# EAGLE board jr-support (EAGLE 8.1.0)
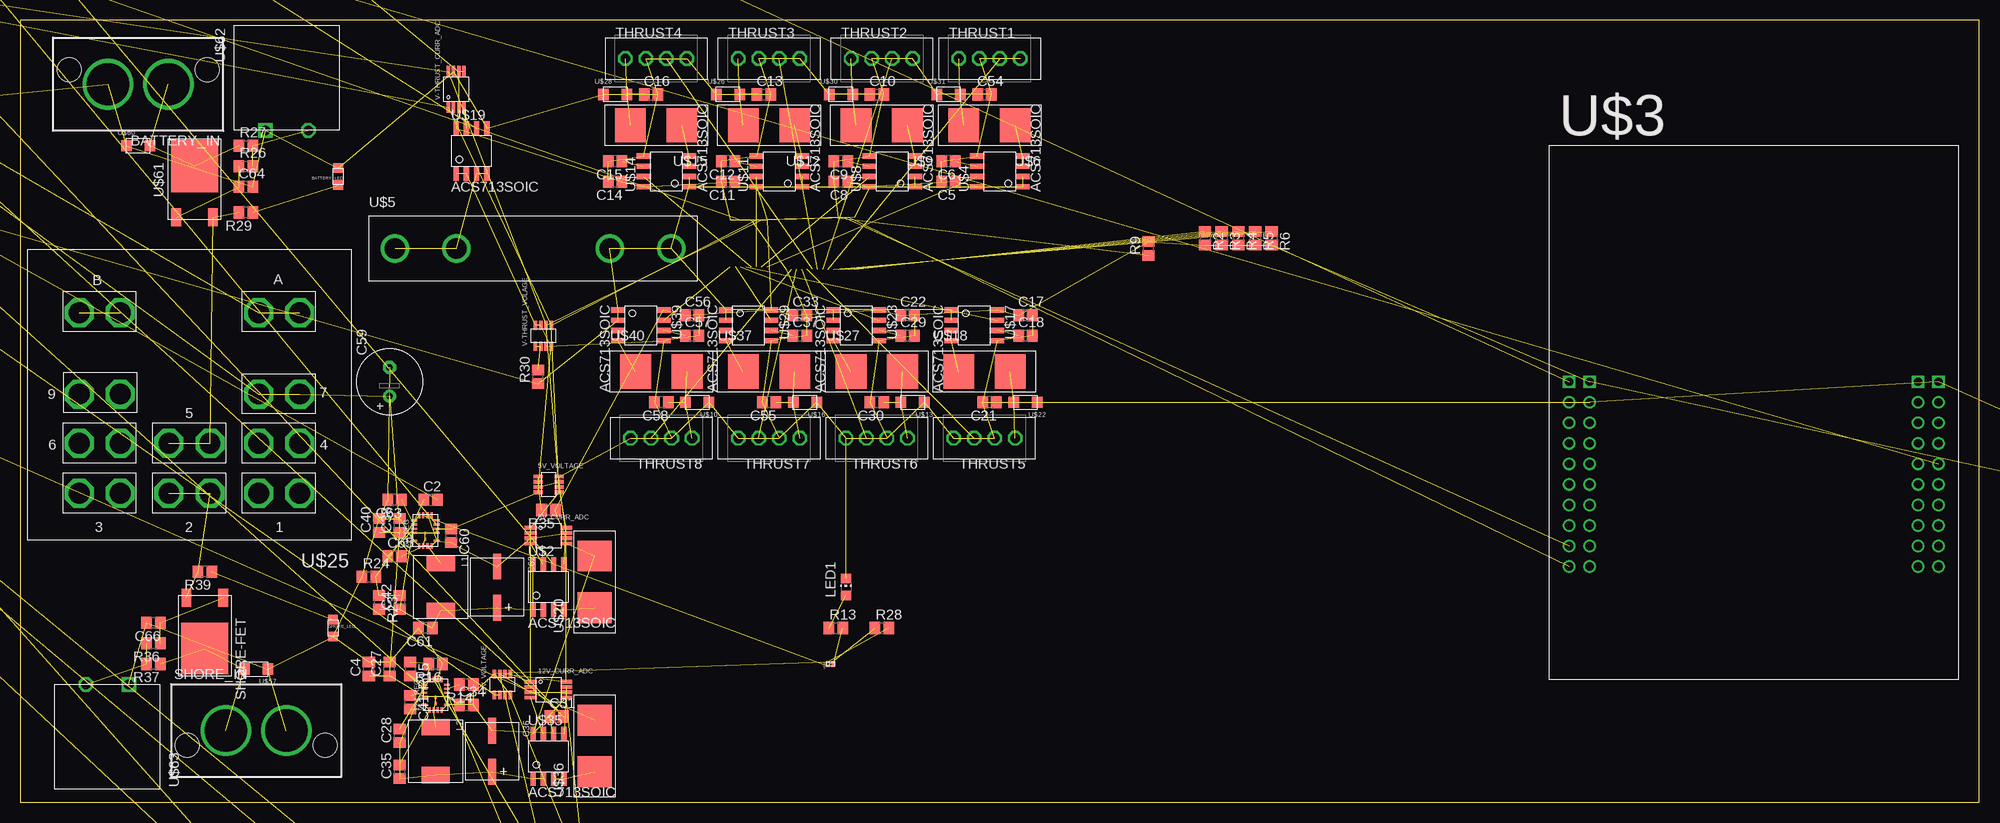
[diagram p0: board, top side]
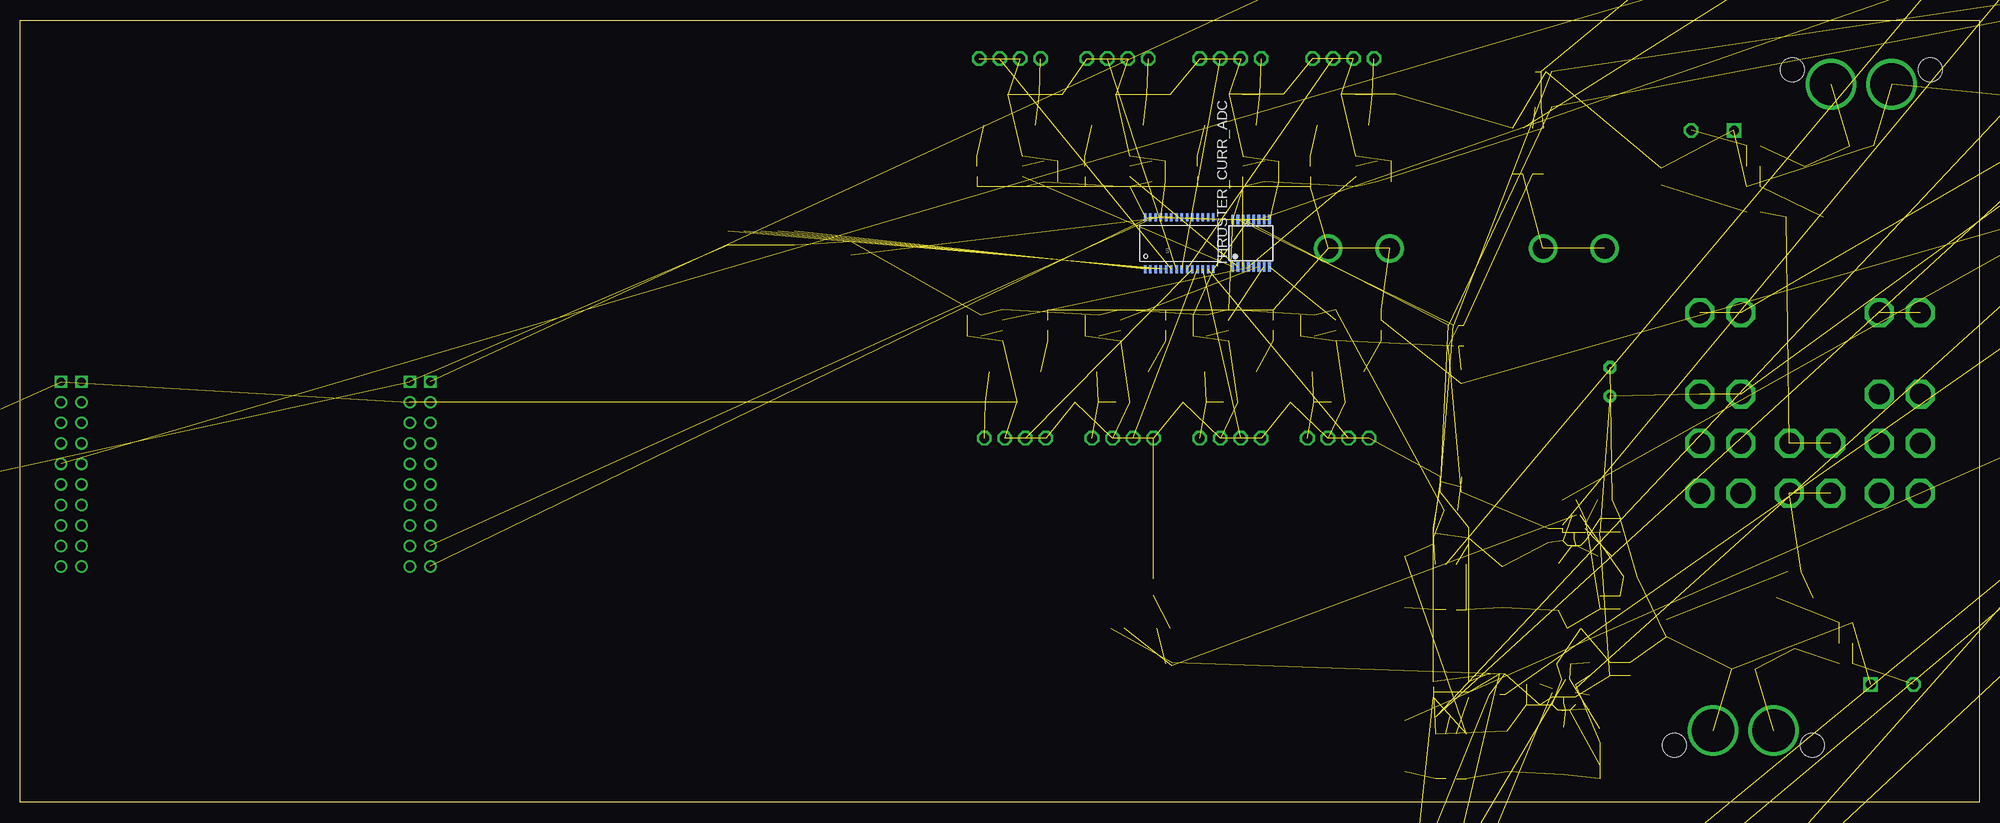
[diagram p1: board, bottom side, seen from below]

Size 242.55 x 96.83 mm. Coordinates in mm from the lower left corner, seen from the top.
Outline: 0,0 242.55,0 242.55,96.83 0,96.83 0,0
Copper layers (1*16): Top 0.035mm / dielectric 1.5mm / Bottom 0.035mm
Design rules "default": minimum track width 10mil, minimum drill 24mil, track to track 8mil, track to pad 8mil, pad to pad 8mil, via to via 8mil, smd to smd 8mil, copper to edge 40mil, drill to drill 8mil, minimum pad ring 10mil, minimum via ring 8mil, stop-mask expansion 4mil, vias tented up to drill 0mil, thermal gap 10mil
Holes 3.17 mm at 22.86,-27.94 30.48,-21.59 34.29,-27.94 30.48,-30.48

## Footprints (pad centres in the part's own frame; a part is rotated, then mirrored left to right if it is on the bottom)
0805 = smd 1.2 x 1.2: P$1 -1.05,0; P$2 1.05,0
VSSOP-8 = smd 0.45 x 1.45: P$1 -0.975,-2.2; P$2 -0.325,-2.2; P$3 0.325,-2.2; P$4 0.975,-2.2; P$5 0.975,2.2; P$6 0.325,2.2; P$7 -0.325,2.2; P$8 -0.975,2.2
KK254_VERT_2PIN = drill 1.2 octagon: P$1 1.27,0; P$2 -1.27,0
QFN18-3X4 = smd 0.25 x 0.7: 1 1.25,1.4; 2 0.75,1.4; 3 0.25,1.4; 4 -0.25,1.4; 6 -1.25,1.4; 11 -1.25,-1.4; 13 -0.25,-1.4; 14 0.25,-1.4; 15 0.75,-1.4; 16 1.25,-1.4 | smd 0.7 x 0.25: 7 -1.9,0.75; 8 -1.9,0.25; 9 -1.9,-0.25; 10 -1.9,-0.75; 17 1.9,-0.75; 18 1.9,-0.25; 19 1.9,0.25; 20 1.9,0.75 | smd 0.4 x 0.22: 21 -1.075,0 | smd 0.356 x 0.22: 22 -0.305,0
SOT-23-8 = smd 0.45 x 1.1: P$1 -0.975,-1.3; P$2 -0.325,-1.3; P$3 0.325,-1.3; P$4 0.975,-1.3; P$5 0.975,1.3; P$6 0.325,1.3; P$7 -0.325,1.3; P$8 -0.975,1.3
SUPERSABRE_2CIRCUIT = drill 5.25: P$1 -3.747,0; P$2 3.747,0 | hole 2.997: -8.534,-1.803; 8.534,-1.803
BME280_LGA = smd 0.5 x 0.35: P$1 1.025,0.975; P$2 1.025,0.325; P$3 1.025,-0.325; P$4 1.025,-0.975; P$5 -1.025,-0.975; P$6 -1.025,-0.325; P$7 -1.025,0.325; P$8 -1.025,0.975
C0805 = smd 1.3 x 1.5: 1 -0.85,0; 2 0.85,0
C-F80 = smd 1 x 3.2: P$1 0,2.55; P$2 0,-2.53
E3,5-8 = drill 0.813 pad 1.6: + -1.778,0 | drill 0.813 pad 1.6 octagon: - 1.778,0
KK254_VERT_4PIN = drill 1.2 octagon: P$1 3.81,0; P$2 1.27,0; P$3 -1.27,0; P$4 -3.81,0
SM8 = smd 0.3 x 1.6: P$1 -0.975,-1.7; P$2 -0.34,-1.7; P$3 0.295,-1.7; P$4 0.93,-1.7; P$5 0.93,1.7; P$6 0.295,1.7; P$7 -0.34,1.7; P$8 -0.975,1.7
L0740 = smd 2 x 3.5: P$1 -2.95,0; P$2 2.95,0
CHIP-LED0805 = smd 1.2 x 1.2: A 0,-1.05; C 0,1.05
R0805 = smd 1.3 x 1.5: 1 -0.85,0; 2 0.85,0
TO252-3 = smd 1.2 x 2.2: 1 -2.28,-6.3; 3 2.28,-6.3 | smd 5.8 x 6.4: TAB 0,0
TSSOP16 = smd 0.35 x 1.2: 1 -2.275,-2.925; 2 -1.625,-2.925; 3 -0.975,-2.925; 4 -0.325,-2.925; 5 0.325,-2.925; 6 0.975,-2.925; 7 1.625,-2.925; 8 2.275,-2.925; 9 2.275,2.925; 10 1.625,2.925; 11 0.975,2.925; 12 0.325,2.925; 13 -0.325,2.925; 14 -0.975,2.925; 15 -1.625,2.925; 16 -2.275,2.925
TSSOP-28_4MM = smd 1 x 0.3: 1 -3.2,4.225; 2 -3.2,3.575; 3 -3.2,2.925; 4 -3.2,2.275; 5 -3.2,1.625; 6 -3.2,0.975; 7 -3.2,0.325; 8 -3.2,-0.325; 9 -3.2,-0.975; 10 -3.2,-1.625; 11 -3.2,-2.275; 12 -3.2,-2.925; 13 -3.2,-3.575; 14 -3.2,-4.225; 15 3.2,-4.225; 16 3.2,-3.575; 17 3.2,-2.925; 18 3.2,-2.275; 19 3.2,-1.625; 20 3.2,-0.975; 21 3.2,-0.325; 22 3.2,0.325; 23 3.2,0.975; 24 3.2,1.625; 25 3.2,2.275; 26 3.2,2.925; 27 3.2,3.575; 28 3.2,4.225
ACS713-SOIC = smd 0.65 x 1.75: P$1 -1.905,-2.8; P$2 -0.635,-2.8; P$3 0.635,-2.8; P$4 1.905,-2.8; P$5 1.905,2.8; P$6 0.635,2.8; P$7 -0.635,2.8; P$8 -1.905,2.8
TIVA-C_EVAL = drill 1.016 square: 1-1 -22.86,3.81; 2-1 22.86,3.81; 3-1 -20.32,3.81; 4-1 20.32,3.81 | drill 1.016: 1-2 -22.86,1.27; 1-3 -22.86,-1.27; 1-4 -22.86,-3.81; 1-5 -22.86,-6.35; 1-6 -22.86,-8.89; 1-7 -22.86,-11.43; 1-8 -22.86,-13.97; 1-9 -22.86,-16.51; 1-10 -22.86,-19.05; 2-2 22.86,1.27; 2-3 22.86,-1.27; 2-4 22.86,-3.81; 2-5 22.86,-6.35; 2-6 22.86,-8.89; 2-7 22.86,-11.43; 2-8 22.86,-13.97; 2-9 22.86,-16.51; 2-10 22.86,-19.05; 3-2 -20.32,1.27; 3-3 -20.32,-1.27; 3-4 -20.32,-3.81; 3-5 -20.32,-6.35; 3-6 -20.32,-8.89; 3-7 -20.32,-11.43; 3-8 -20.32,-13.97; 3-9 -20.32,-16.51; 3-10 -20.32,-19.05; 4-2 20.32,1.27; 4-3 20.32,-1.27; 4-4 20.32,-3.81; 4-5 20.32,-6.35; 4-6 20.32,-8.89; 4-7 20.32,-11.43; 4-8 20.32,-13.97; 4-9 20.32,-16.51; 4-10 20.32,-19.05
1.25"_FUSECLIPS = drill 2.54: P$1 -17.107,0; P$2 -9.487,0; P$3 9.487,0; P$4 17.107,0
154-OMNI-BLOK = smd 3.81 x 4.242: P$1 -3.188,0; P$2 3.188,0
DO-219AB = smd 1.3 x 1.4: P$1 -1.45,0; P$2 1.45,0
KUHP_6.35MM-QUICK-CONNECT = drill 2.57 octagon: 1A -13.64,6.17; 1B -8.56,6.17; 2A -2.54,6.17; 2B 2.54,6.17; 3A 8.56,6.17; 3B 13.64,6.17; 4A -13.64,0; 4B -8.56,0; 5A -2.54,0; 5B 2.54,0; 6A 8.56,0; 6B 13.64,0; 7A -13.64,-6.1; 7B -8.56,-6.1; 9A 8.56,-6.1; 9B 13.64,-6.1; AA -13.64,-16.18; AB -8.56,-16.18; BA 8.56,-16.18; BB 13.64,-16.18
TSSOP5 = smd 0.3 x 0.6: P$1 -0.65,-1.125; P$2 0,-1.125; P$3 0.65,-1.125; P$4 0.65,1.125; P$5 -0.62,1.125
SOD-923_SMD = smd 0.36 x 0.25: P$1 -0.78,0; P$2 0.78,0
X1-DFN1006-2 = smd 0.4 x 0.7: P$1 -0.35,0; P$2 0.35,0
AP02002 = smd 0.4 x 0.25: P$1 -0.35,0.225; P$2 -0.35,-0.225 | smd 0.4 x 0.7: P$3 0.35,0
GPTS203211B = drill 1.2 square: P$1 0,-2.65 | drill 1.2 octagon: P$2 0,2.65

## Placement (x,y rotation side)
3V3_LED  [0805]  -64.77,168.91 0 top  (outside the outline)
5V_CURR_ADC  ADC121C021  [VSSOP-8]  65.41,33.02 270 top
5V_LED  [0805]  -53.34,168.91 0 top  (outside the outline)
5V_OUT  5V_OUT  [KK254_VERT_2PIN]  -134.62,83.82 0 top  (outside the outline)
5V_REG  LT8640  [QFN18-3X4]  50.16,33.66 90 top
5V_VOLTAGE  INA219SOT23  [SOT-23-8]  65.41,39.37 270 top
12V_CURR_ADC  ADC121C021  [VSSOP-8]  65.41,13.97 270 top
12V_LED  [0805]  -60.96,168.91 0 top  (outside the outline)
12V_OUT  12V_OUT  [KK254_VERT_2PIN]  -97.16,83.82 0 top  (outside the outline)
12V_REG  LT8640  [QFN18-3X4]  51.44,13.34 90 top
12V_VOLTAGE  INA219SOT23  [SOT-23-8]  59.69,14.61 0 top
BATTERY_IN  2_SUPERSABRE  [SUPERSABRE_2CIRCUIT]  14.61,88.9 180 top
BATTERY_LED  [0805]  39.37,77.47 90 top
BME280  BME280  [BME280_LGA]  -66.67,90.17 0 top  (outside the outline)
C1  0.1u  [C0805]  -132.08,139.7 0 top  (outside the outline)
C2  0.1u  [C0805]  50.8,37.47 0 top
C3  47n  [C0805]  -41.91,158.75 0 top  (outside the outline)
C4  1u  [C0805]  43.18,16.51 90 top
C5  0.1u  [C0805]  114.94,76.83 180 top
C6  47n  [C0805]  114.94,79.38 180 top
C7  [C0805]  -15.24,168.91 0 top  (outside the outline)
C8  0.1u  [C0805]  101.6,76.83 180 top
C9  47n  [C0805]  101.6,79.38 180 top
C10  [C0805]  106.05,87.63 0 top
C11  0.1u  [C0805]  87.63,76.83 180 top
C12  47n  [C0805]  87.63,79.38 180 top
C13  [C0805]  92.08,87.63 0 top
C14  0.1u  [C0805]  73.66,76.83 180 top
C15  47n  [C0805]  73.66,79.38 180 top
C16  [C0805]  78.11,87.63 0 top
C17  0.1u  [C0805]  124.46,60.33 0 top
C18  47n  [C0805]  124.46,57.78 0 top
C19  0.1u  [C0805]  -48.26,146.05 0 top  (outside the outline)
C20  47n  [C0805]  -52.07,152.4 0 top  (outside the outline)
C21  [C0805]  120.02,49.53 180 top
C22  0.1u  [C0805]  109.86,60.33 0 top
C23  100p  [C0805]  -74.93,139.7 0 top  (outside the outline)
C24  100n  [C0805]  -55.88,139.7 0 top  (outside the outline)
C25  100n  [C0805]  -71.75,119.38 0 top  (outside the outline)
C26  100n  [C0805]  -68.58,139.7 0 top  (outside the outline)
C27  10u  [C0805]  45.72,16.51 90 top
C28  15p  [C0805]  46.99,8.26 90 top
C29  47n  [C0805]  109.86,57.78 0 top
C30  [C0805]  106.05,49.53 180 top
C31  47n  [C0805]  66.4,10.63 0 top
C32  1u  [C0805]  50.8,-34.92 0 top  (outside the outline)
C33  0.1u  [C0805]  96.52,60.33 0 top
C34  1u  [C0805]  55.24,12.06 0 top
C35  22u  [C0805]  46.99,3.81 90 top
C36  220u  [C-F80]  58.42,6.35 180 top
C37  47n  [C0805]  96.52,57.78 0 top
C38  1u  [C0805]  46.99,34.29 90 top
C39  1u  [C0805]  -102.87,152.4 0 top  (outside the outline)
C40  10u  [C0805]  44.45,34.29 90 top
C41  0.1u  [C0805]  48.28,12.4 270 top
C42  15p  [C0805]  46.99,24.77 90 top
C43  [C0805]  -76.2,162.56 0 top  (outside the outline)
C44  [C0805]  -81.28,162.56 0 top  (outside the outline)
C45  [C0805]  -86.36,162.56 0 top  (outside the outline)
C46  [C0805]  -91.44,162.56 0 top  (outside the outline)
C47  [C0805]  -96.52,162.56 0 top  (outside the outline)
C48  [C0805]  -101.6,162.56 0 top  (outside the outline)
C49  [C0805]  -106.68,162.56 0 top  (outside the outline)
C50  [C0805]  -111.76,162.56 0 top  (outside the outline)
C51  [C0805]  -116.84,162.56 0 top  (outside the outline)
C52  [C0805]  -121.92,162.56 0 top  (outside the outline)
C53  [C0805]  -127,162.56 0 top  (outside the outline)
C54  [C0805]  119.38,87.63 0 top
C55  [C0805]  92.71,49.53 180 top
C56  0.1u  [C0805]  83.19,60.33 0 top
C57  47n  [C0805]  83.19,57.78 0 top
C58  [C0805]  79.38,49.53 180 top
C59  100u  [E3,5-8]  45.72,52.07 90 top
C60  1u  [C0805]  53.34,33.02 270 top
C61  22u  [C0805]  50.16,21.59 180 top
C62  220u  [C-F80]  59.05,26.67 180 top
C63  1u  [C0805]  46.35,37.47 180 top
C64  2.2u  [C0805]  27.94,76.2 0 top
C65  0.1u  [C0805]  46.35,30.48 0 top
C66  2.2u  [C0805]  16.51,22.23 180 top
C67  [C0805]  -50.16,81.92 0 top  (outside the outline)
C68  [C0805]  280.67,48.9 0 top  (outside the outline)
CAMERA1  KK254_VERT_2PIN22-29-2021  [KK254_VERT_2PIN]  -119.38,100.33 0 top  (outside the outline)
CAMERA2  KK254_VERT_2PIN22-29-2021  [KK254_VERT_2PIN]  -106.68,100.33 0 top  (outside the outline)
CPU_ON  KK254_VERT_2PIN22-29-2021  [KK254_VERT_2PIN]  -90.81,99.06 0 top  (outside the outline)
CPU_PWR  CPU PWR  [KK254_VERT_4PIN]  13.97,203.84 90 top  (outside the outline)
DEPTH_SENS  Depth Sensor  [KK254_VERT_4PIN]  -67.31,81.92 0 top  (outside the outline)
ETHERNET  KK254_VERT_2PIN22-29-2021  [KK254_VERT_2PIN]  -83.82,83.82 0 top  (outside the outline)
FAN1  KK254_VERT_2PIN22-29-2021  [KK254_VERT_2PIN]  -49.53,74.3 0 top  (outside the outline)
FAN2  Ethernet switch pwr  [KK254_VERT_2PIN]  267.33,37.47 270 top  (outside the outline)
I2C_SHIFT  [SM8]  -50.8,104.14 0 top  (outside the outline)
L1  2.2u  [L0740]  52.07,26.67 270 top
L2  2.2u  [L0740]  51.44,6.35 270 top
LED1  FASTCHG  [CHIP-LED0805]  102.23,26.67 0 top
LED2  FASTCHG  [CHIP-LED0805]  71.75,-31.75 90 top  (outside the outline)
R1  10k  [R0805]  -138.43,152.4 0 top  (outside the outline)
R2  10k  [R0805]  146.69,69.85 270 top
R3  10k  [R0805]  148.75,69.85 270 top
R4  10k  [R0805]  150.82,69.85 270 top
R5  10k  [R0805]  152.9,69.85 270 top
R6  10k  [R0805]  154.94,69.85 270 top
R7  4.7k  [R0805]  -81.28,139.7 0 top  (outside the outline)
R8  4.7k  [R0805]  -87.63,139.7 0 top  (outside the outline)
R9  10k  [R0805]  139.7,68.58 90 top
R10  10k  [R0805]  -91.44,146.05 0 top  (outside the outline)
R11  10k  [R0805]  -96.52,146.05 0 top  (outside the outline)
R12  200k  [R0805]  -43.18,139.7 0 top  (outside the outline)
R13  1.2k  [R0805]  100.97,21.59 0 top
R14  41.2k  [R0805]  55.24,14.61 180 top
R15  1M  [R0805]  48.29,16.51 270 top
R16  88.7k  [R0805]  51.44,17.14 180 top
R17  41.2k  [R0805]  -36.83,139.7 0 top  (outside the outline)
R18  510  [R0805]  -111.76,146.05 0 top  (outside the outline)
R19  10k  [R0805]  -116.84,146.05 0 top  (outside the outline)
R20  1.5k  [R0805]  -93.98,139.7 0 top  (outside the outline)
R21  6.8k  [R0805]  -100.33,139.7 0 top  (outside the outline)
R22  0  [R0805]  -121.92,146.05 0 top  (outside the outline)
R23  1M  [R0805]  44.45,24.77 270 top
R24  243k  [R0805]  43.18,27.94 0 top
R25  10  [R0805]  -132.08,146.05 0 top  (outside the outline)
R26  43k  [R0805]  27.94,78.74 0 top
R27  4.3k  [R0805]  27.94,81.28 0 top
R28  50k  [R0805]  106.68,21.59 0 top
R29  1.5k  [R0805]  27.94,73.03 180 top
R30  10  [R0805]  64.14,52.7 90 top
R31  270  [R0805]  -21.59,152.4 0 top  (outside the outline)
R32  1.5k  [R0805]  -119.38,139.7 0 top  (outside the outline)
R33  1.2k  [R0805]  -125.73,139.7 0 top  (outside the outline)
R34  68  [R0805]  -26.67,152.4 0 top  (outside the outline)
R35  10  [R0805]  65.41,36.2 180 top
R36  43k  [R0805]  16.51,19.68 180 top
R37  4.3k  [R0805]  16.51,17.14 180 top
R38  1.2k  [R0805]  76.83,-33.02 90 top  (outside the outline)
R39  1.5k  [R0805]  22.86,28.57 180 top
R40  50k  [R0805]  76.83,-27.3 90 top  (outside the outline)
RELAY-OUT_LED  [0805]  -45.72,168.91 0 top  (outside the outline)
SHORE-FET  IPD50P04P4-13  [TO252-3]  22.86,19.05 180 top
SHORE_IN  2_SUPERSABRE  [SUPERSABRE_2CIRCUIT]  29.21,8.89 0 top
SHORE_LED  [0805]  38.73,21.59 270 top
THRUST1  KK254_VERT_4PIN22-29-2041  [KK254_VERT_4PIN]  120.02,92.08 0 top
THRUST2  KK254_VERT_4PIN22-29-2041  [KK254_VERT_4PIN]  106.68,92.08 0 top
THRUST3  KK254_VERT_4PIN22-29-2041  [KK254_VERT_4PIN]  92.71,92.08 0 top
THRUST4  KK254_VERT_4PIN22-29-2041  [KK254_VERT_4PIN]  78.74,92.08 0 top
THRUST5  KK254_VERT_4PIN22-29-2041  [KK254_VERT_4PIN]  119.38,45.09 180 top
THRUST6  KK254_VERT_4PIN22-29-2041  [KK254_VERT_4PIN]  106.05,45.09 180 top
THRUST7  KK254_VERT_4PIN22-29-2041  [KK254_VERT_4PIN]  92.71,45.09 180 top
THRUST8  KK254_VERT_4PIN22-29-2041  [KK254_VERT_4PIN]  79.38,45.09 180 top
THRUSTER_CURR_ADC  ADS7828  [TSSOP16]  90.17,69.22 0 bottom
U1  PCA9685  [TSSOP-28_4MM]  99.06,69.22 90 bottom
U$2  ACS713SOIC  [ACS713-SOIC]  65.41,26.67 0 top
U$3  TIVA-C_EVAL  [TIVA-C_EVAL]  214.63,48.26 0 top
U$4  ACS713SOIC  [ACS713-SOIC]  121.28,78.11 90 top
U$5  25A Fuse  [1.25"_FUSECLIPS]  63.5,68.58 0 top
U$6  4A Fuse  [154-OMNI-BLOK]  120.02,83.82 180 top
U$8  ACS713SOIC  [ACS713-SOIC]  107.95,78.11 90 top
U$9  4A Fuse  [154-OMNI-BLOK]  106.68,83.82 180 top
U$10  VTVS  [DO-219AB]  83.82,49.53 180 top
U$11  ACS713SOIC  [ACS713-SOIC]  93.98,78.11 90 top
U$12  4A Fuse  [154-OMNI-BLOK]  92.71,83.82 180 top
U$13  VTVS  [DO-219AB]  110.49,49.53 180 top
U$14  ACS713SOIC  [ACS713-SOIC]  80.01,78.11 90 top
U$15  4A Fuse  [154-OMNI-BLOK]  78.74,83.82 180 top
U$16  VTVS  [DO-219AB]  97.16,49.53 180 top
U$17  ACS713SOIC  [ACS713-SOIC]  118.11,59.05 270 top
U$18  4A Fuse  [154-OMNI-BLOK]  119.38,53.34 0 top
U$19  ACS713SOIC  [ACS713-SOIC]  55.88,80.64 0 top
U$20  4A Fuse  [154-OMNI-BLOK]  71.12,27.3 90 top
U$22  VTVS  [DO-219AB]  124.46,49.53 180 top
U$23  ACS713SOIC  [ACS713-SOIC]  103.5,59.05 270 top
U$25  KUHP-5XX1-XX  [KUHP_6.35MM-QUICK-CONNECT]  20.95,44.45 180 top
U$26  VTVS  [DO-219AB]  87.63,87.63 0 top
U$27  4A Fuse  [154-OMNI-BLOK]  106.05,53.34 0 top
U$28  VTVS  [DO-219AB]  73.66,87.63 0 top
U$29  ACS713SOIC  [ACS713-SOIC]  90.17,59.05 270 top
U$30  VTVS  [DO-219AB]  101.6,87.63 0 top
U$31  VTVS  [DO-219AB]  114.94,87.63 0 top
U$32  VTVS  [DO-219AB]  -113.03,158.75 0 top  (outside the outline)
U$33  VTVS  [DO-219AB]  -119.38,158.75 0 top  (outside the outline)
U$34  VTVS  [DO-219AB]  -125.73,158.75 0 top  (outside the outline)
U$35  ACS713SOIC  [ACS713-SOIC]  65.41,5.71 0 top
U$36  4A Fuse  [154-OMNI-BLOK]  71.12,6.99 90 top
U$37  4A Fuse  [154-OMNI-BLOK]  92.71,53.34 0 top
U$38  VTVS  [DO-219AB]  -132.08,158.75 0 top  (outside the outline)
U$39  ACS713SOIC  [ACS713-SOIC]  76.83,59.05 270 top
U$40  4A Fuse  [154-OMNI-BLOK]  79.38,53.34 0 top
U$45  74LVC1G14  [TSSOP5]  73.66,-39.37 0 top  (outside the outline)
U$46  ESD9X3  [SOD-923_SMD]  -34.29,168.91 0 top  (outside the outline)
U$47  ESD9X3  [SOD-923_SMD]  -36.83,168.91 0 top  (outside the outline)
U$48  ESD9X3  [SOD-923_SMD]  -39.37,168.91 0 top  (outside the outline)
U$49  ESD9X3  [SOD-923_SMD]  -41.91,168.91 0 top  (outside the outline)
U$50  VTVS  [DO-219AB]  -138.43,158.75 0 top  (outside the outline)
U$51  DESD  [X1-DFN1006-2]  -25.4,172.72 0 top  (outside the outline)
U$52  DESD  [X1-DFN1006-2]  -26.67,168.91 0 top  (outside the outline)
U$53  DESD  [X1-DFN1006-2]  -29.21,168.91 0 top  (outside the outline)
U$54  DESD  [X1-DFN1006-2]  -31.75,168.91 0 top  (outside the outline)
U$57  VTVS  [DO-219AB]  29.21,16.51 180 top
U$58  DMP32D5SFB  [AP02002]  100.33,17.14 0 top
U$59  VTVS  [DO-219AB]  78.11,-40.01 0 top  (outside the outline)
U$60  VTVS  [DO-219AB]  14.61,81.28 0 top
U$61  IPD50P04P4-13  [TO252-3]  21.59,78.74 0 top
U$62  GPTS203212B  [GPTS203211B]  33.02,83.19 270 top
U$63  GPTS203212B  [GPTS203211B]  10.79,14.61 90 top
U$64  DESD  [X1-DFN1006-2]  -45.72,83.19 0 top  (outside the outline)
U$65  DESD  [X1-DFN1006-2]  285.75,50.16 0 top  (outside the outline)
U$66  DMP32D5SFB  [AP02002]  81.28,-33.66 90 top  (outside the outline)
V-THRUST_CURR_ADC  ADC121C021  [VSSOP-8]  53.98,88.27 0 top
V-THRUST_LED  [0805]  -57.15,168.91 0 top  (outside the outline)
V-THRUST_OUT  Vin_OUT  [KK254_VERT_2PIN]  -113.03,86.36 0 top  (outside the outline)
V-THRUST_VOLAGE  INA219SOT23  [SOT-23-8]  64.77,57.78 0 top

## Library data of the parts
3V3_LED 5V_LED 12V_LED BATTERY_LED LED1 LED2 RELAY-OUT_LED SHORE_LED V-THRUST_LED = led
5V_CURR_ADC 5V_VOLTAGE 12V_CURR_ADC 12V_VOLTAGE I2C_SHIFT THRUSTER_CURR_ADC U$3 V-THRUST_CURR_ADC V-THRUST_VOLAGE = texas
5V_OUT 12V_OUT BATTERY_IN CAMERA1 CAMERA2 CPU_ON CPU_PWR DEPTH_SENS ETHERNET FAN1 FAN2 SHORE_IN THRUST1-THRUST8 V-THRUST_OUT = molex
5V_REG 12V_REG = linear
BME280 = BME280ComponentLibrary; PROD_ID: IC-13090
C1-C68 L1 L2 R1-R40 = resistor
SHORE-FET U$61 = transistor-power
U1 = NXP; PROD_ID: IC-12240
U$2 U$4 U$8 U$11 U$14 U$17 U$19 U$23 U$29 U$35 U$39 = allegro
U$5 U$6 U$9 U$12 U$15 U$18 U$20 U$27 U$36 U$37 U$40 = littelfuse
U$10 U$13 U$16 U$22 U$26 U$28 U$30-U$34 U$38 U$46-U$54 U$57 U$59 U$60 U$64 U$65 = diode
U$25 = TE
U$45 = NXP
U$58 U$66 = transistor-fet
U$62 U$63 = switches

## Nets
3V3: BME280.P$2 BME280.P$5 BME280.P$6 BME280.P$8 C24.1 C25.1 C26.1 C52.1 I2C_SHIFT.P$2 R10.2 R11.2 R34.2 U$3.1-1
5V: 5V_CURR_ADC.P$5 5V_CURR_ADC.P$6 5V_OUT.P$1 12V_CURR_ADC.P$5 C1.1 C5.1 C7.1 C8.1 C11.1 C14.1 C17.1 C19.1 C22.1 C33.1 C43.1 C48.1 C51.1 C53.1 C56.1 C67.1 C68.1 DEPTH_SENS.P$4 ETHERNET.P$1 FAN1.P$1 FAN2.P$1 R1.2 R2.2 R3.2 R4.2 R5.2 R6.2 R7.2 R8.2 R9.2 R12.2 R21.2 R31.2 R35.1 THRUSTER_CURR_ADC.10 THRUSTER_CURR_ADC.16 U1.28 U$3.3-1 U$4.P$8 U$8.P$8 U$11.P$8 U$14.P$8 U$17.P$8 U$19.P$8 U$20.P$2 U$23.P$8 U$29.P$8 U$35.P$8 U$39.P$8 U$45.P$5 U$51.P$2 U$52.P$2 U$53.P$2 U$54.P$2 U$64.P$2 U$65.P$2 V-THRUST_CURR_ADC.P$3 V-THRUST_CURR_ADC.P$5 V-THRUST_CURR_ADC.P$6
12V: 12V_OUT.P$1 C44.1 C45.1 C50.1 CPU_PWR.P$3 CPU_PWR.P$4 R25.1 R33.2 U$36.P$2 U$46.P$1 U$47.P$1 U$48.P$1 U$49.P$1
AIN0: U$3.3-9
AIN1: U$3.3-8
AIN2: U$3.3-7
AIN3: U$3.2-3
AIN4: U$3.3-6
AIN5: U$3.3-5
AIN8: U$3.1-6
AIN9: U$3.1-5
AIN10: U$3.1-7
AIN11: U$3.1-2
CPU_ON: 12V_REG.14 U$45.P$4
GND: 3V3_LED.P$2 5V_CURR_ADC.P$3 5V_CURR_ADC.P$7 5V_LED.P$2 5V_OUT.P$2 5V_REG.6 5V_REG.7 5V_REG.10 5V_REG.11 5V_REG.18 5V_VOLTAGE.P$3 5V_VOLTAGE.P$7 5V_VOLTAGE.P$8 12V_CURR_ADC.P$3 12V_CURR_ADC.P$6 12V_CURR_ADC.P$7 12V_LED.P$2 12V_OUT.P$2 12V_REG.6 12V_REG.7 12V_REG.10 12V_REG.11 12V_REG.18 12V_VOLTAGE.P$3 12V_VOLTAGE.P$7 BATTERY_IN.P$2 BATTERY_LED.P$2 BME280.P$1 BME280.P$7 C1.2 C2.2 C3.2 C4.2 C5.2 C6.2 C7.2 C8.2 C9.2 C10.2 C11.2 C12.2 C13.2 C14.2 C15.2 C16.2 C17.2 C18.2 C19.2 C20.2 C21.2 C22.2 C23.2 C24.2 C25.2 C26.2 C27.2 C29.2 C30.2 C31.2 C33.2 C34.2 C35.2 C36.P$2 C37.2 C38.2 C39.2 C40.2 C43.2 C44.2 C45.2 C46.2 C47.2 C48.2 C49.2 C50.2 C51.2 C52.2 C53.2 C54.2 C55.2 C56.2 C57.2 C58.2 C59.- C60.2 C61.2 C62.P$2 C63.2 C64.2 C66.2 C67.2 C68.2 CAMERA1.P$2 CAMERA2.P$2 CPU_PWR.P$1 CPU_PWR.P$2 DEPTH_SENS.P$3 ETHERNET.P$2 FAN1.P$2 FAN2.P$2 I2C_SHIFT.P$1 LED1.C LED2.C R14.1 R16.1 R17.1 R19.2 R22.2 R24.1 RELAY-OUT_LED.P$2 SHORE_IN.P$2 SHORE_LED.P$2 THRUST1.P$1 THRUST1.P$3 THRUST2.P$1 THRUST2.P$3 THRUST3.P$1 THRUST3.P$3 THRUST4.P$1 THRUST4.P$3 THRUST5.P$1 THRUST5.P$3 THRUST6.P$1 THRUST6.P$3 THRUST7.P$1 THRUST7.P$3 THRUST8.P$1 THRUST8.P$3 THRUSTER_CURR_ADC.9 THRUSTER_CURR_ADC.12 THRUSTER_CURR_ADC.13 U1.14 U1.23 U1.25 U$2.P$5 U$3.2-1 U$3.3-2 U$4.P$5 U$8.P$5 U$10.P$1 U$11.P$5 U$13.P$1 U$14.P$5 U$16.P$1 U$17.P$5 U$19.P$5 U$22.P$1 U$23.P$5 U$26.P$1 U$28.P$1 U$29.P$5 U$30.P$1 U$31.P$1 U$32.P$1 U$33.P$1 U$34.P$1 U$35.P$5 U$38.P$1 U$39.P$5 U$46.P$2 U$47.P$2 U$48.P$2 U$49.P$2 U$50.P$1 U$51.P$1 U$52.P$1 U$53.P$1 U$54.P$1 U$57.P$1 U$60.P$1 U$62.P$1 U$63.P$1 U$64.P$1 U$65.P$1 V-THRUST_CURR_ADC.P$7 V-THRUST_LED.P$2 V-THRUST_OUT.P$2 V-THRUST_VOLAGE.P$3
N$1: 12V_REG.15 R14.2
N$2: R1.1 U$3.2-5
N$3: R6.1 U1.5
N$4: R5.1 U1.4
N$5: R4.1 U1.3
N$6: R3.1 U1.2
N$7: 12V_REG.1 C28.1 C35.1 C36.P$1 L2.P$2 R15.2 U$35.P$1 U$35.P$2
N$8: 5V_REG.15 R17.2
N$9: R2.1 U1.1
N$10: R9.1 U1.24
N$11: C3.1 U$2.P$6
N$12: C9.1 U$8.P$6
N$13: C6.1 U$4.P$6
N$14: C54.1 THRUST1.P$4 U$6.P$2 U$31.P$2
N$15: U$4.P$3 U$4.P$4 U$6.P$1
N$16: C10.1 THRUST2.P$4 U$9.P$2 U$30.P$2
N$17: U$8.P$3 U$8.P$4 U$9.P$1
N$18: C12.1 U$11.P$6
N$19: C13.1 THRUST3.P$4 U$12.P$2 U$26.P$2
N$20: U$11.P$3 U$11.P$4 U$12.P$1
N$21: C15.1 U$14.P$6
N$22: C16.1 THRUST4.P$4 U$15.P$2 U$28.P$2
N$23: R22.1 THRUSTER_CURR_ADC.11
N$24: U$14.P$3 U$14.P$4 U$15.P$1
N$25: C18.1 U$17.P$6
N$26: C21.1 THRUST5.P$4 U$18.P$2 U$22.P$2
N$27: U$17.P$3 U$17.P$4 U$18.P$1
N$28: C29.1 U$23.P$6
N$29: C30.1 THRUST6.P$4 U$13.P$2 U$27.P$2
N$30: U$23.P$3 U$23.P$4 U$27.P$1
N$31: C37.1 U$29.P$6
N$32: 12V_REG.8 12V_REG.9 12V_REG.21 12V_REG.22 C41.2 L2.P$1
N$33: C20.1 U$19.P$6
N$34: U$5.P$1 U$5.P$2 U$19.P$3 U$19.P$4
N$35: R19.1 U$25.AA U$25.AB
N$36: C55.1 THRUST7.P$4 U$16.P$2 U$37.P$2
N$37: U$29.P$3 U$29.P$4 U$37.P$1
N$38: C57.1 U$39.P$6
N$39: C58.1 THRUST8.P$4 U$10.P$2 U$40.P$2
N$40: 5V_REG.8 5V_REG.9 5V_REG.21 5V_REG.22 C65.2 L1.P$1
N$41: C23.1 I2C_SHIFT.P$7 I2C_SHIFT.P$8 R12.1
N$42: 5V_REG.20 C42.2 R23.1 R24.2
N$43: 5V_REG.3 C65.1
N$44: 12V_REG.20 C28.2 R15.1 R16.2
N$45: 12V_REG.3 C41.1
N$47: U$39.P$3 U$39.P$4 U$40.P$1
N$48: 5V_REG.2 C63.1
N$49: 12V_VOLTAGE.P$1 12V_VOLTAGE.P$2 R25.2
N$50: R37.1 SHORE-FET.TAB SHORE_IN.P$1 U$57.P$2
N$51: C32.2 CPU_ON.P$2 U$45.P$3 U$59.P$1
N$52: C31.1 U$35.P$6
N$53: U$19.P$7 V-THRUST_CURR_ADC.P$4
N$54: 12V_REG.2 C39.1
N$55: U$2.P$3 U$2.P$4 U$20.P$1
N$56: U$35.P$3 U$35.P$4 U$36.P$1
N$57: 5V_CURR_ADC.P$4 U$2.P$7
N$58: R30.2 V-THRUST_VOLAGE.P$1 V-THRUST_VOLAGE.P$2
N$59: C32.1 R18.2 U$45.P$2
N$60: 12V_CURR_ADC.P$4 U$35.P$7
N$61: CPU_ON.P$1 R18.1 R21.1 U$59.P$2
N$62: C66.1 R36.1 SHORE-FET.1
N$63: R36.2 R37.2 U$63.P$2
N$64: BATTERY_IN.P$1 R27.1 U$60.P$2 U$61.TAB
N$65: C64.1 R26.1 U$61.1
N$66: R26.2 R27.2 U$62.P$2
N$67: LED1.A R13.1
N$68: R20.1 RELAY-OUT_LED.P$1
N$69: BATTERY_LED.P$1 R29.1
N$70: R13.2 U$58.P$3
N$71: 5V_LED.P$1 R31.1
N$72: R32.1 V-THRUST_LED.P$1
N$73: 12V_LED.P$1 R33.1
N$74: 3V3_LED.P$1 R34.1
N$75: R39.1 SHORE_LED.P$1
N$76: 5V_REG.19 R28.1 U$58.P$2
N$77: 5V_VOLTAGE.P$1 5V_VOLTAGE.P$2 R35.2
N$78: LED2.A R38.1
N$79: R38.2 U$66.P$3
N$80: 12V_REG.19 R40.1 U$66.P$2
RELAY-BATT: R29.2 U$25.5A U$25.5B U$61.3
RELAY-CTRL: U$25.BA U$25.BB
RELAY-SHORE: R39.2 SHORE-FET.3 U$25.2A U$25.2B
RELAY_OUT: 5V_REG.4 5V_REG.13 5V_REG.14 5V_VOLTAGE.P$4 12V_REG.4 12V_REG.13 12V_VOLTAGE.P$4 12V_VOLTAGE.P$8 C4.1 C27.1 C34.1 C38.1 C40.1 C59.+ C60.1 R20.2 R28.2 R40.2 U$19.P$1 U$19.P$2 U$25.7A U$25.7B U$50.P$2 U$58.P$1 U$66.P$1 V-THRUST_VOLAGE.P$4 V-THRUST_VOLAGE.P$7 V-THRUST_VOLAGE.P$8
RX: U$3.1-3
SCL1: 5V_CURR_ADC.P$1 5V_VOLTAGE.P$5 12V_CURR_ADC.P$1 12V_VOLTAGE.P$5 I2C_SHIFT.P$6 R8.1 THRUSTER_CURR_ADC.14 U1.26 U$3.1-9 V-THRUST_CURR_ADC.P$1 V-THRUST_VOLAGE.P$5
SCL3: U$3.2-7
SCL-3V3: BME280.P$4 DEPTH_SENS.P$1 I2C_SHIFT.P$3 R11.1
SDA1: 5V_CURR_ADC.P$8 5V_VOLTAGE.P$6 12V_CURR_ADC.P$8 12V_VOLTAGE.P$6 I2C_SHIFT.P$5 R7.1 THRUSTER_CURR_ADC.15 U1.27 U$3.1-10 V-THRUST_CURR_ADC.P$8 V-THRUST_VOLAGE.P$6
SDA3: U$3.2-6
SDA-3V3: BME280.P$3 DEPTH_SENS.P$2 I2C_SHIFT.P$4 R10.1
SW-5V: 5V_REG.1 C2.1 C42.1 C61.1 C62.P$1 L1.P$2 R23.2 U$2.P$1 U$2.P$2 U$2.P$8
T1_CURR: THRUSTER_CURR_ADC.1 U$4.P$7
T1_PWM: THRUST1.P$2 U1.6
T2_CURR: THRUSTER_CURR_ADC.2 U$8.P$7
T2_PWM: THRUST2.P$2 U1.7
T3_CURR: THRUSTER_CURR_ADC.3 U$11.P$7
T3_PWM: THRUST3.P$2 U1.8
T4_CURR: THRUSTER_CURR_ADC.4 U$14.P$7
T4_PWM: THRUST4.P$2 U1.9
T5_CURR: THRUSTER_CURR_ADC.5 U$17.P$7
T5_PWM: THRUST5.P$2 U1.10
T6_CURR: THRUSTER_CURR_ADC.6 U$23.P$7
T6_PWM: THRUST6.P$2 U1.11
T7_CURR: THRUSTER_CURR_ADC.7 U$29.P$7
T7_PWM: THRUST7.P$2 U1.12
T8_CURR: THRUSTER_CURR_ADC.8 U$39.P$7
T8_PWM: THRUST8.P$2 U1.13
TX: U$3.1-4
V_THRUST: C46.1 C47.1 C49.1 CAMERA1.P$1 CAMERA2.P$1 R30.1 R32.2 U$4.P$1 U$4.P$2 U$5.P$3 U$5.P$4 U$8.P$1 U$8.P$2 U$11.P$1 U$11.P$2 U$14.P$1 U$14.P$2 U$17.P$1 U$17.P$2 U$23.P$1 U$23.P$2 U$29.P$1 U$29.P$2 U$32.P$2 U$33.P$2 U$34.P$2 U$38.P$2 U$39.P$1 U$39.P$2 V-THRUST_OUT.P$1

## Tracks (layer width: path | path; a pad name or v marks a point on that pad's centre or on a via)
3V3  (12 unrouted)
5V  (62 unrouted)
12V  (12 unrouted)
CPU_ON  (1 unrouted)
GND  (177 unrouted)
  cutout Top (isolate 0.305, rank 6, no thermals): -4.45,106.05 -4.45,-18.41 252.09,-18.41 252.09,106.05
N$1  (1 unrouted)
N$2  (1 unrouted)
N$3  (1 unrouted)
N$4  (1 unrouted)
N$5  (1 unrouted)
N$6  (1 unrouted)
N$7  (7 unrouted)
N$8  (1 unrouted)
N$9  (1 unrouted)
N$10  (1 unrouted)
N$11  (1 unrouted)
N$12  (1 unrouted)
N$13  (1 unrouted)
N$14  (3 unrouted)
N$15  (2 unrouted)
N$16  (3 unrouted)
N$17  (2 unrouted)
N$18  (1 unrouted)
N$19  (3 unrouted)
N$20  (2 unrouted)
N$21  (1 unrouted)
N$22  (3 unrouted)
N$23  (1 unrouted)
N$24  (2 unrouted)
N$25  (1 unrouted)
N$26  (3 unrouted)
N$27  (2 unrouted)
N$28  (1 unrouted)
N$29  (3 unrouted)
N$30  (2 unrouted)
N$31  (1 unrouted)
N$32  (5 unrouted)
N$33  (1 unrouted)
N$34  (3 unrouted)
N$35  (2 unrouted)
N$36  (3 unrouted)
N$37  (2 unrouted)
N$38  (1 unrouted)
N$39  (3 unrouted)
N$40  (5 unrouted)
N$41  (3 unrouted)
N$42  (3 unrouted)
N$43  (1 unrouted)
N$44  (3 unrouted)
N$45  (1 unrouted)
N$47  (2 unrouted)
N$48  (1 unrouted)
N$49  (2 unrouted)
N$50  (3 unrouted)
N$51  (3 unrouted)
N$52  (1 unrouted)
N$53  (1 unrouted)
N$54  (1 unrouted)
N$55  (2 unrouted)
N$56  (2 unrouted)
N$57  (1 unrouted)
N$58  (2 unrouted)
N$59  (2 unrouted)
N$60  (1 unrouted)
N$61  (3 unrouted)
N$62  (2 unrouted)
N$63  (2 unrouted)
N$64  (3 unrouted)
N$65  (2 unrouted)
N$66  (2 unrouted)
N$67  (1 unrouted)
N$68  (1 unrouted)
N$69  (1 unrouted)
N$70  (1 unrouted)
N$71  (1 unrouted)
N$72  (1 unrouted)
N$73  (1 unrouted)
N$74  (1 unrouted)
N$75  (1 unrouted)
N$76  (2 unrouted)
N$77  (2 unrouted)
N$78  (1 unrouted)
N$79  (1 unrouted)
N$80  (2 unrouted)
RELAY-BATT  (3 unrouted)
RELAY-CTRL  (1 unrouted)
RELAY-SHORE  (3 unrouted)
RELAY_OUT  (27 unrouted)
SCL1  (10 unrouted)
SCL-3V3  (3 unrouted)
SDA1  (10 unrouted)
SDA-3V3  (3 unrouted)
SW-5V  (9 unrouted)
T1_CURR  (1 unrouted)
T1_PWM  (1 unrouted)
T2_CURR  (1 unrouted)
T2_PWM  (1 unrouted)
T3_CURR  (1 unrouted)
T3_PWM  (1 unrouted)
T4_CURR  (1 unrouted)
T4_PWM  (1 unrouted)
T5_CURR  (1 unrouted)
T5_PWM  (1 unrouted)
T6_CURR  (1 unrouted)
T6_PWM  (1 unrouted)
T7_CURR  (1 unrouted)
T7_PWM  (1 unrouted)
T8_CURR  (1 unrouted)
T8_PWM  (1 unrouted)
V_THRUST  (29 unrouted)